# Altium PCB ADE7753.PcbDoc
Units mm, origin at the board's own origin, x right, y up, seen from the top; angles counter-clockwise.
Board outline 99.95 x 99.95 mm, 2 copper layers (Top Layer, Bottom Layer); 35 components, 35 nets, 163 pads, 0 vias.
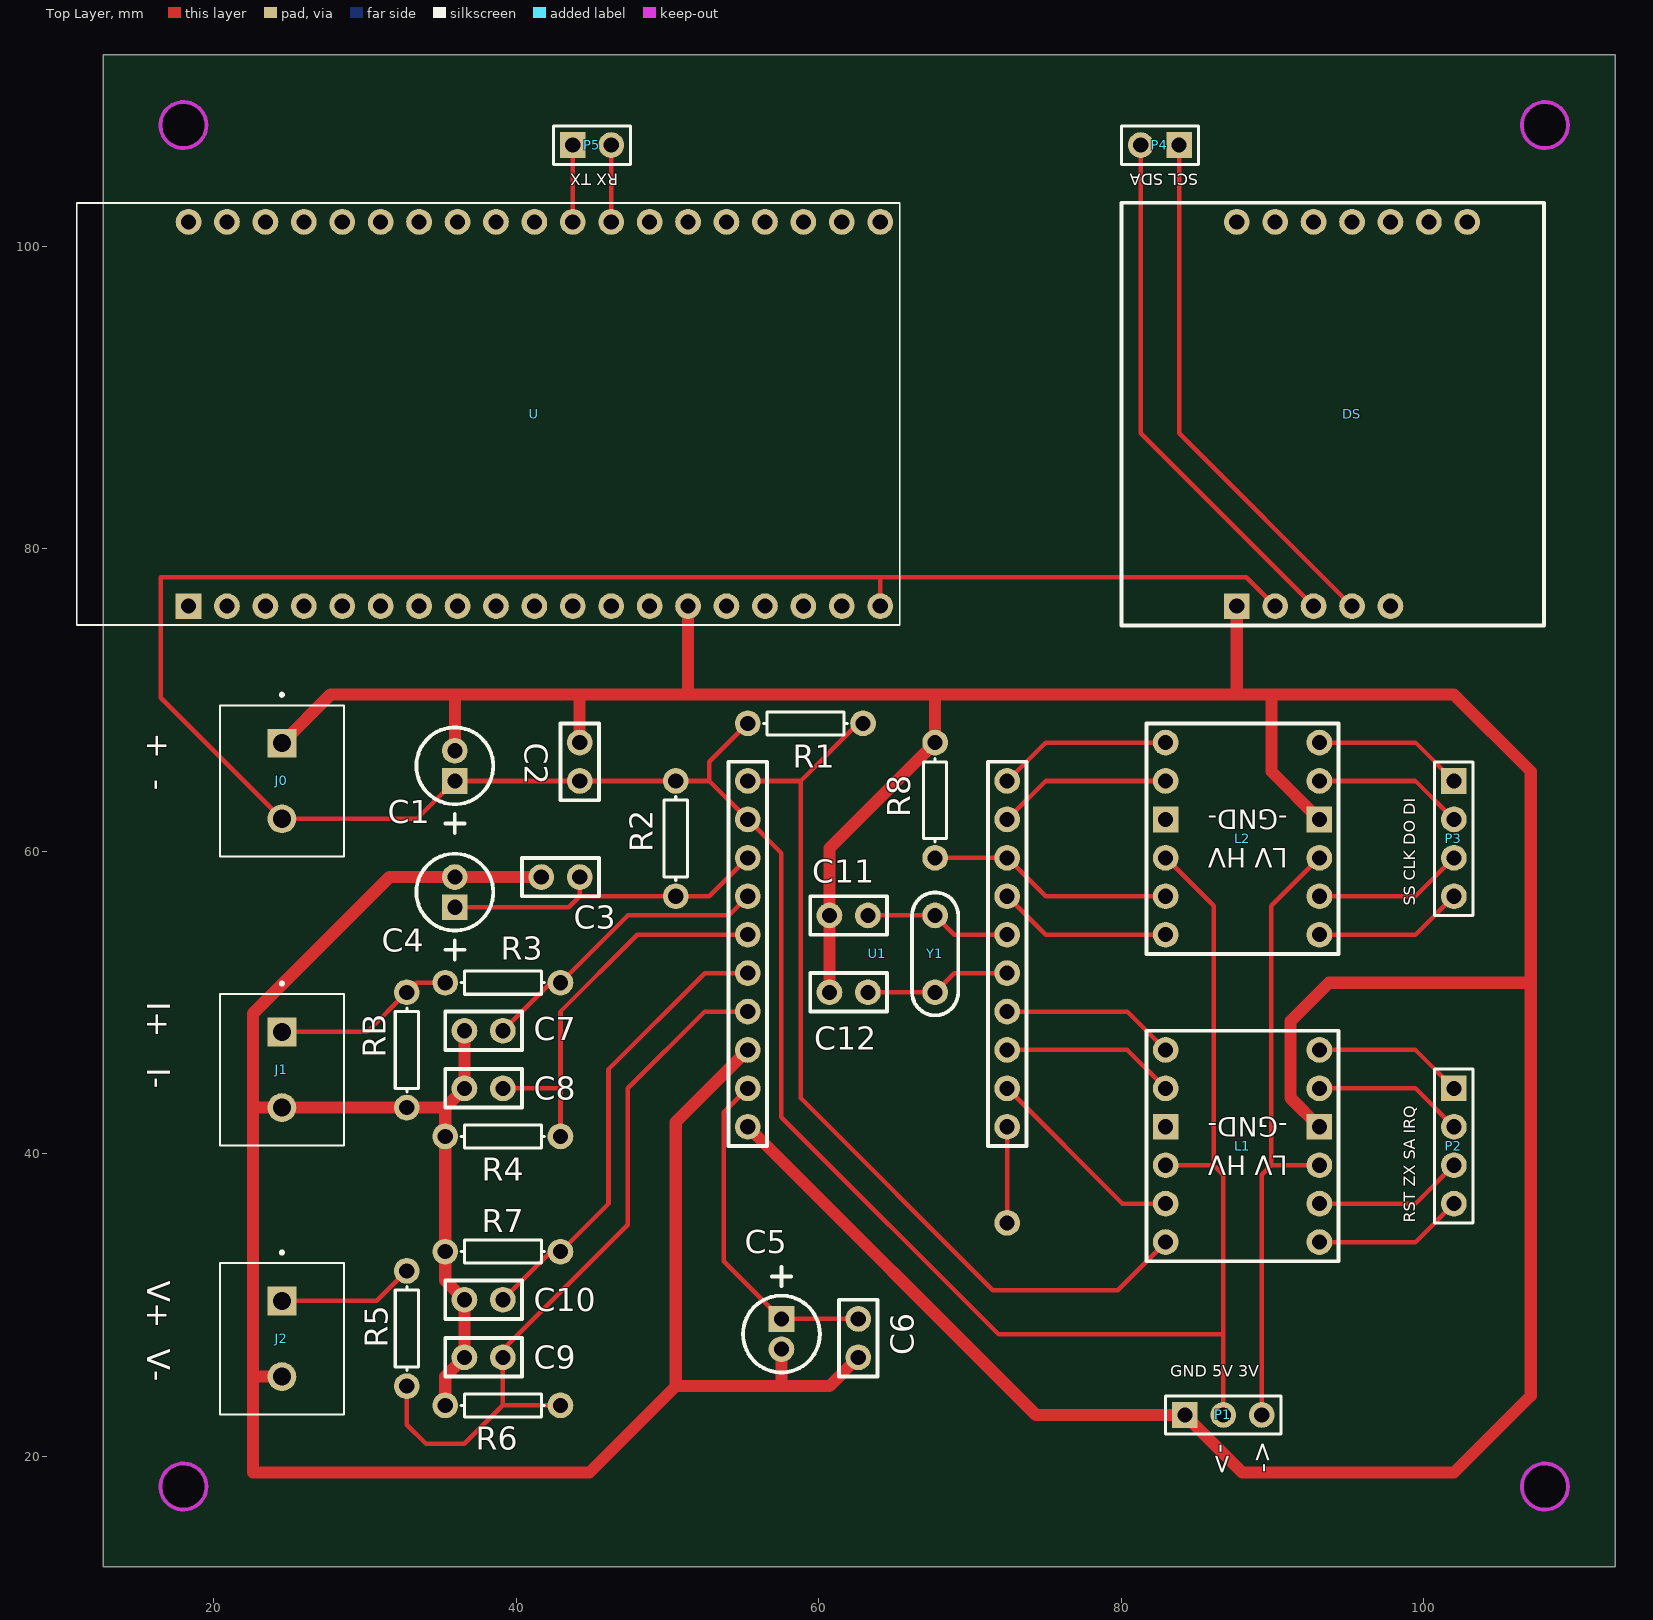
[diagram p0: Top Layer view]
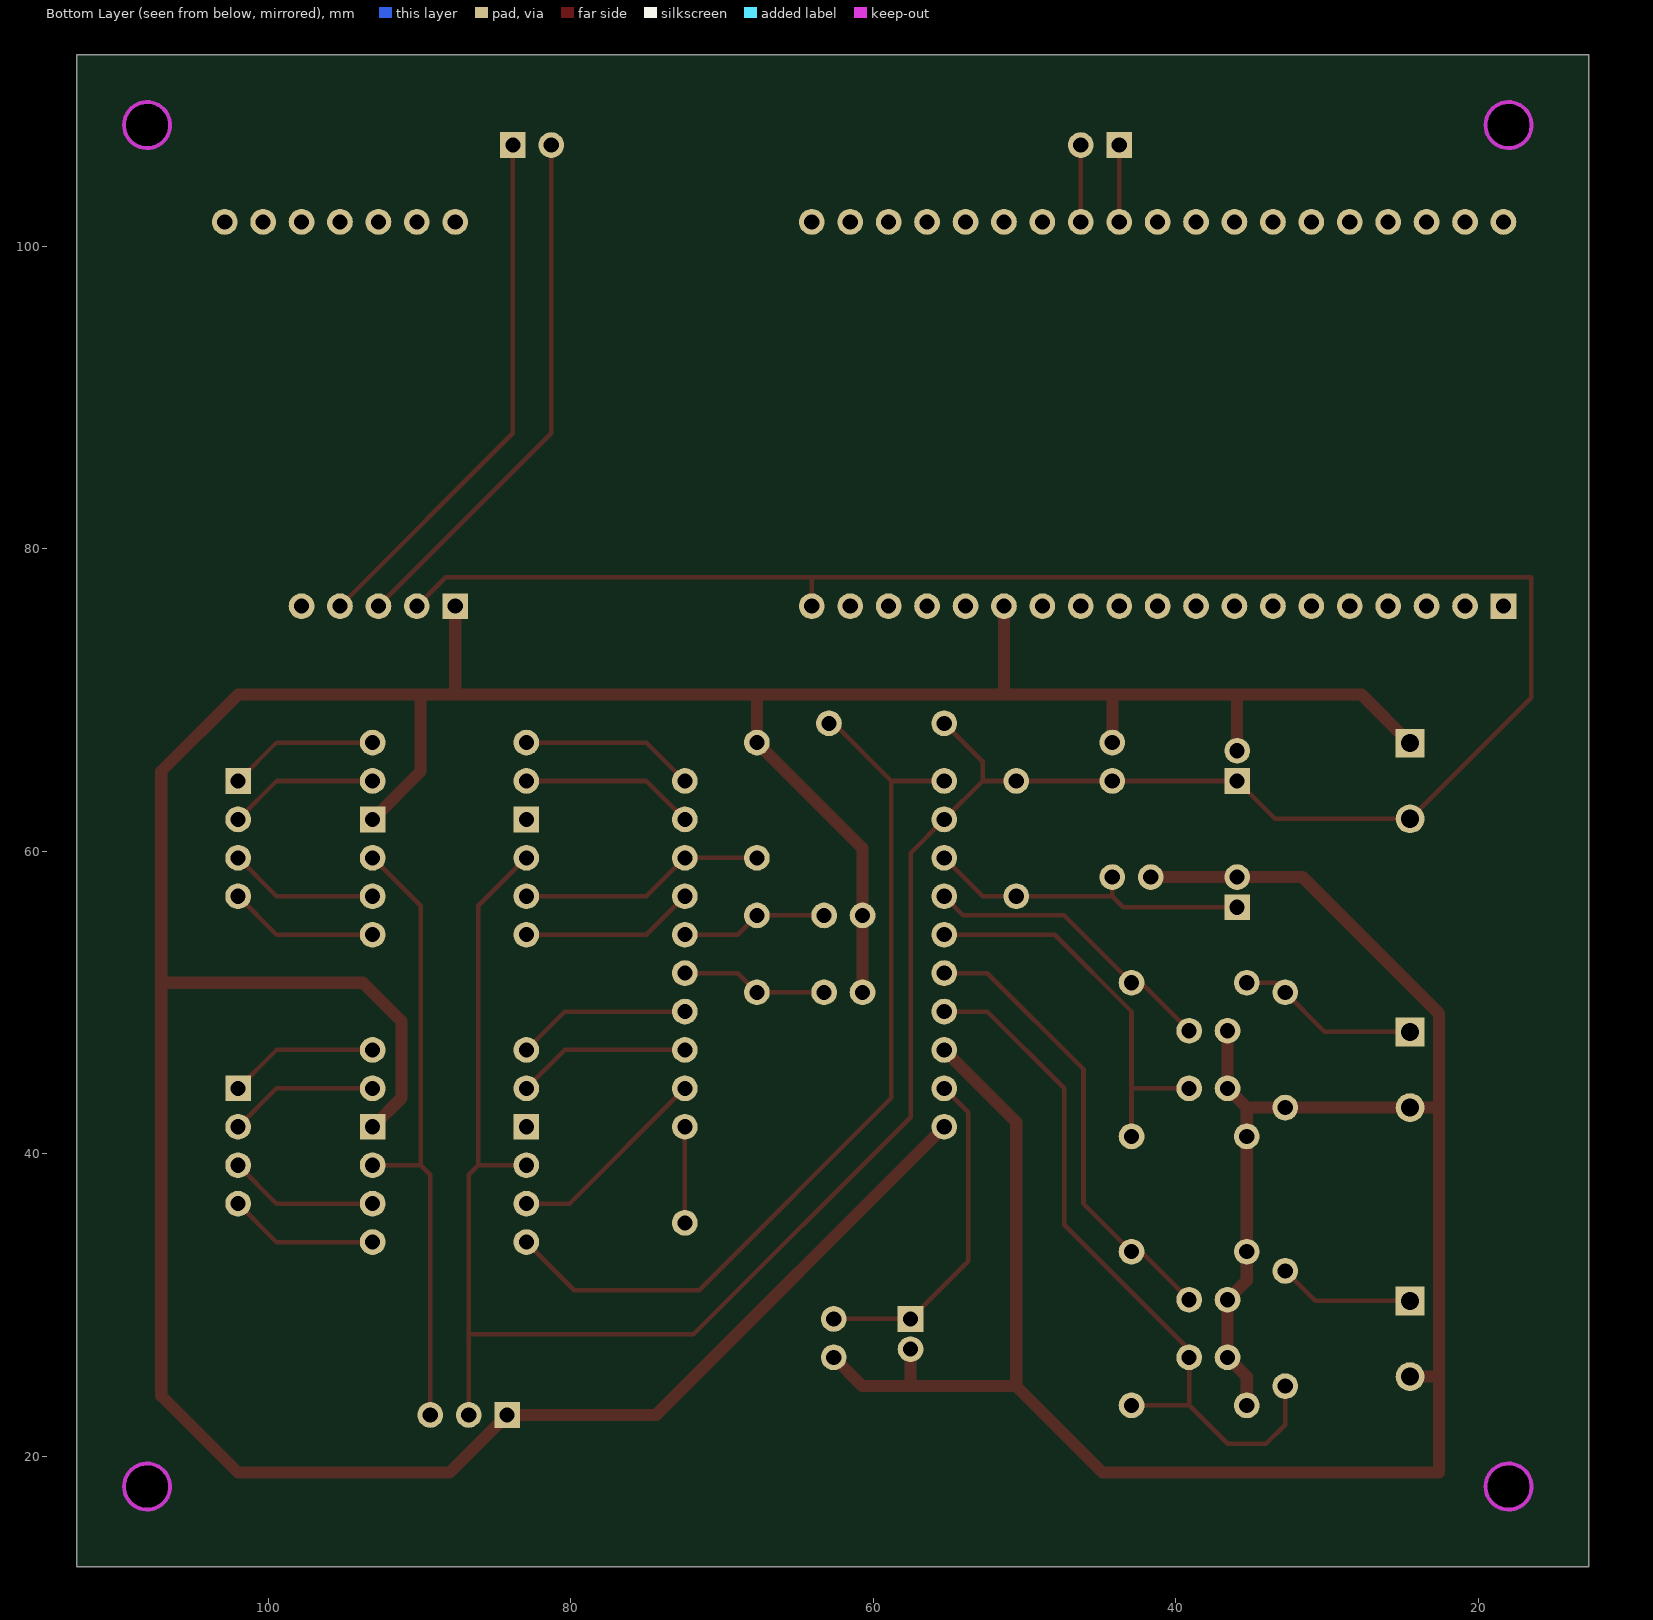
[diagram p1: Bottom Layer view, seen from below]

## Layer stack, top to bottom
Top Solder: solder mask 0.0102, Solder Resist, Dk 3.5
Top Layer: signal copper 0.0356
Dielectric 1: dielectric 0.32, FR-4, Dk 4.8
Bottom Layer: signal copper 0.0356
Bottom Solder: solder mask 0.0102, Solder Resist, Dk 3.5

## Board outline
12.7,12.7 112.649,12.7 112.649,112.649 12.7,112.649
cut-out: 106.475,18 ccw(c108,18) 108,16.475 ccw(c108,18) 109.525,18 ccw(c108,18) 108,19.525 ccw(c108,18)
cut-out: 18,16.475 cw(c18,18) 16.475,18 cw(c18,18) 18,19.525 cw(c18,18) 19.525,18 cw(c18,18)
cut-out: 108,106.475 cw(c108,108) 106.475,108 cw(c108,108) 108,109.525 cw(c108,108) 109.525,108 cw(c108,108)
cut-out: 18,106.475 cw(c18,108) 16.475,108 cw(c18,108) 18,109.525 cw(c18,108) 19.525,108 cw(c18,108)

## Design rules (kind name [scope] priority, off if disabled: settings)
Clearance [All] p1: gap=0.254 ignorepadtopadclearanceinfootprint=FALSE
ComponentClearance [All] p1: gap=0 collisioncheckmode=3 verticalgap=0 showdistances=FALSE
HoleSize [All] p1: absolutevalues=TRUE maxlimit=2.54 minlimit=1 maxpercent=80.000 minpercent=20.000
PolygonConnect [All] p1: connectstyle=Relief reliefconductorwidth=0.254 reliefentries=4 polygonreliefangle="90 Angle" airgapwidth=0.254
RoutingVias [All] p1: holewidth=0.711 width=1.27 viastyle="Through Hole" minholewidth=0.711 minwidth=1.27 maxholewidth=0.711 maxwidth=1.27
SolderMaskExpansion [All] p1: expansion=0.102
Width [All] p1: maxlimit=1 minlimit=0.3 preferedwidth=0.3
28 further rules are at their usual default settings.

## Components (designator, comment, footprint, x,y, rotation, side; value= is the part's Value field where it differs from the comment)
C1 "Cap Pol1" "Tu hóa 10uF 50v" 35.941,65.643 r90 top value=10uF
C2 "Cap" "Tu Gom" 44.196,65.913 r90 top value=100nF
C3 "Cap" "Tu Gom" 42.926,58.293 r180 top value=100nF
C4 "Cap Pol1" "Tu hóa 10uF 50v" 35.941,57.293 r90 top value=220uF
C5 "Cap Pol1" "Tu hóa 10uF 50v" 57.531,28.083 r270 top value=10uF
C6 "Cap" "Tu Gom" 62.611,27.813 r90 top value=100nF
C7 "Cap" "Tu Gom" 37.846,48.133 r0 top value=33nF
C8 "Cap" "Tu Gom" 37.846,44.323 r180 top value=33nF
C9 "Cap" "Tu Gom" 37.846,26.543 r0 top value=33nF
C10 "Cap" "Tu Gom" 37.846,30.353 r180 top value=33nF
C11 "Cap" "Tu Gom" 61.976,55.753 r0 top value=22pF
C12 "Cap" "Tu Gom" 61.976,50.673 r0 top value=22pF
DS "DS1307" PCBComponent_1 95.25,88.9 r90 top
J0 "Power" CONN_282836-2 24.511,64.643 r270 top
J1 "V1" CONN_282836-2 24.511,45.553 r270 top
J2 "V2" CONN_282836-2 24.511,27.773 r270 top
L1 "Logic" "Logic level 3-5" 88.011,40.513 r180 top
L2 "Logic" "Logic level 3-5" 88.011,60.833 r180 top
P1 "Header 3" HDR1X3 84.201,22.733 r0 top
P2 "Header 4" HDR1X4 101.981,44.323 r270 top
P3 "Header 4" HDR1X4 101.981,64.643 r270 top
P4 "Header 2" HDR1X2 83.82,106.68 r180 top
P5 "Header 2" HDR1X2 43.74,106.68 r0 top
R1 "Res1" AXIAL-0.3 59.118,68.453 r180 top value=10K
R2 "Res1" AXIAL-0.3 50.546,60.833 r90 top value=10R
R3 "Res1" AXIAL-0.3 39.116,51.308 r0 top value=1K
R4 "Res1" AXIAL-0.3 39.116,41.148 r0 top value=1K
R5 "Res1" AXIAL-0.3 32.766,28.448 r270 top value=1M
R6 "Res1" AXIAL-0.3 39.116,23.368 r0 top value=1K
R7 "Res1" AXIAL-0.3 39.116,33.528 r180 top value=1K
R8 "Res1" AXIAL-0.3 67.691,63.373 r270 top value=10K
RB "Res1" AXIAL-0.3 32.766,46.863 r90 top value=1K
U "ESP32-DEVKITC-32D" MODULE_ESP32-DEVKITC-32D 38.1,88.9 r90 top
U1 "ADE7753" ADE_Header 63.881,53.213 r0 top
Y1 "XTAL" "3.5795 mhz crystal" 67.691,53.213 r270 top

## Footprints (in the part's own frame and the unit in brackets; to place one, negate y for a bottom-side part, rotate by r counter-clockwise, add the part's x,y. Pads: shape width x height; smd on the part's side, far side on the other; paste and mask are expansions set on the pad)
"3.5795 mhz crystal" [mm]
  round 1.7 hole 1: 1(-2.54,0) 1(-2.54,0) 2(2.54,0)
  silkscreen extent -4.06,-1.52 4.06,1.52
ADE_Header [mm]
  round 1.7 hole 1 mask+0.1: 1(-8.572,11.43) 2(-8.572,8.89) 3(-8.572,6.35) 4(-8.572,3.81) 5(-8.572,1.27) 6(-8.572,-1.27) 7(-8.572,-3.81) 8(-8.572,-6.35) 9(-8.572,-8.89) 10(-8.572,-11.43) 11(8.572,-11.43) 12(8.572,-8.89) 13(8.572,-6.35) 14(8.572,-3.81) 15(8.572,-1.27) 16(8.572,1.27) 17(8.572,3.81) 18(8.572,6.35) 19(8.572,8.89) 20(8.572,11.43)
  silkscreen extent -9.84,-12.7 9.84,12.7
AXIAL-0.3 [mm] "Axial Device, Thru-Hole; 2 Leads; 0.3 in Pin Spacing"
  round 1.7 hole 1: 1(-3.81,0) 2(3.81,0)
  silkscreen extent -2.77,-0.76 2.77,0.76
CONN_282836-2 [mm]
  rect 1.9x1.9 hole 1.2: 1(-2.5,0)
  round 1.9 hole 1.2: 2(2.5,0)
  silkscreen extent -5.8,-4.1 5,4.1, body extent -5.28,-4.1 5.32,4.1, height 10.08
HDR1X2 [mm] "Connector; Header; 2 Position"
  rect 1.7x1.7 hole 1: 1(0,0)
  round 1.7 hole 1: 2(2.54,0)
  silkscreen extent -1.27,-1.27 3.81,1.27
HDR1X3 [mm] "Connector; Header; 3 Position"
  rect 1.7x1.7 hole 1: 1(0,0)
  round 1.7 hole 1: 2(2.54,0) 3(5.08,0)
  silkscreen extent -1.27,-1.27 6.35,1.27
HDR1X4 [mm] "Connector; Header; 4 Position"
  rect 1.7x1.7 hole 1: 1(0,0)
  round 1.7 hole 1: 2(2.54,0) 3(5.08,0) 4(7.62,0)
  silkscreen extent -1.27,-1.27 8.89,1.27
"Logic level 3-5" [mm] "4 channels , 12 pins"
  round 1.7 hole 1 mask+0.1: 1(-5.08,6.35) 1(-5.08,6.35) 2(5.08,6.35) 3(-5.08,3.81) 4(5.08,3.81) 5(-5.08,1.27) 6(5.08,1.27) 9(-5.08,-3.81) 10(5.08,-3.81) 11(-5.08,-6.35) 12(5.08,-6.35)
  rect 1.7x1.7 hole 1 mask+0.1: 7(-5.08,-1.27) 8(5.08,-1.27)
  silkscreen extent -6.35,-7.62 6.35,7.62
MODULE_ESP32-DEVKITC-32D [mm]
  rect 1.7x1.7 hole 1: 1(-12.7,19.76)
  round 1.7 hole 1: 2(-12.7,17.22) 3(-12.7,14.68) 4(-12.7,12.14) 5(-12.7,9.6) 6(-12.7,7.06) 7(-12.7,4.52) 8(-12.7,1.98) 9(-12.7,-0.56) 10(-12.7,-3.1) 11(-12.7,-5.64) 12(-12.7,-8.18) 13(-12.7,-10.72) 14(-12.7,-13.26) 15(-12.7,-15.8) 16(-12.7,-18.34) 17(-12.7,-20.88) 18(-12.7,-23.42) 19(-12.7,-25.96) 20(12.7,19.76) 21(12.7,17.22) 22(12.7,14.68) 23(12.7,12.14) 24(12.7,9.6) 25(12.7,7.06) 26(12.7,4.52) 27(12.7,1.98) 28(12.7,-0.56) 29(12.7,-3.1) 30(12.7,-5.64) 31(12.7,-8.18) 32(12.7,-10.72) 33(12.7,-13.26) 34(12.7,-15.8) 35(12.7,-18.34) 36(12.7,-20.88) 37(12.7,-23.42) 38(12.7,-25.96)
  silkscreen extent -13.95,-27.25 13.95,27.15
PCBComponent_1 [mm]
  rect 1.7x1.7 hole 1 mask+0.1: 1(-12.7,7.62)
  round 1.7 hole 1 mask+0.1: 2(-12.7,5.08) 3(-12.7,2.54) 4(-12.7,0) 5(-12.7,-2.54) 6(12.7,-7.62) 7(12.7,-5.08) 8(12.7,-2.54) 9(12.7,0) 10(12.7,2.54) 11(12.7,5.08) 12(12.7,7.62)
  silkscreen extent -13.97,-12.7 13.97,15.24
"Tu Gom" [mm]
  round 1.7 hole 1: 1(-1.27,0) 2(1.27,0)
  silkscreen extent -2.54,-1.27 2.54,1.27
"Tu hóa 10uF 50v" [mm] "5x11mm, lead space 2mm"
  rect 1.7x1.7 hole 1: 1(-1,0)
  round 1.7 hole 1: 2(1,0)
  silkscreen extent -4.44,-2.54 2.54,2.54

## Part data
C1 C4 C5: "Polarized Capacitor (Radial)", LatestRevisionDate=17-Jul-2002, LatestRevisionNote="Re-released for DXP Platform.", PackageDescription="Polarized Capacitor (Radial); 2 Leads", PackageReference=RB7.6-15, Published=8-Jun-2000, Publisher="Altium Limited"
C2 C3 C6 C7 C8 C9 C10 C11 C12: "Capacitor", LatestRevisionDate=17-Jul-2002, LatestRevisionNote="Re-released for DXP Platform.", PackageDescription="Radial Cap, Thru-Hole; 2 Leads; 0.3 in Pin Spacing", PackageReference=RAD-0.3, Published=8-Jun-2000, Publisher="Altium Limited"
DS: library part Component_1
J0 J1 J2: library part 282836-2, "TERM BLOCK 2POS SIDE ENTRY 5MM", Package=None, Availability=Unavailable, MF="{'manufacturer': u'TE Connectivity'}", MP=282836-2, Price=None
L1 L2: library part "Header 6X2", "Header, 6-Pin, Dual row", LatestRevisionDate=17-Jul-2002, LatestRevisionNote="Re-released for DXP Platform.", Publisher="Altium Limited"
P1: "Header, 3-Pin", LatestRevisionDate=17-Jul-2002, LatestRevisionNote="Re-released for DXP Platform.", Publisher="Altium Limited"
P2 P3: "Header, 4-Pin", LatestRevisionDate=17-Jul-2002, LatestRevisionNote="Re-released for DXP Platform.", Publisher="Altium Limited"
P4 P5: "Header, 2-Pin", LatestRevisionDate=17-Jul-2002, LatestRevisionNote="Re-released for DXP Platform.", Publisher="Altium Limited"
R1 R2 R3 R4 R5 R6 R7 R8 RB: "Resistor", LatestRevisionDate=17-Jul-2002, LatestRevisionNote="Re-released for DXP Platform.", PackageDescription="Axial Device, Thru-Hole; 2 Leads; 0.3 in Pin Spacing", PackageReference=AXIAL-0.3, Published=8-Jun-2000, Publisher="Altium Limited"
U: "- Transceiver; 802.11 b/g/n _Wi-Fi, WiFi, WLAN_, Bluetooth® Smart Ready 4.x Dual Mode For Use With ESP-WROOM-32", Package=None, Availability=Unavailable, MF="Espressif Systems", MP=ESP32-DEVKITC-32D, Price=None, SnapEDA_Link=https://www.snapeda.com/parts/ESP32-DEVKITC-32D/Espressif%20Systems/view-part/2777395/?ref=snap
U1: "Single-Phase Multifunction Metering IC", Package=None, Availability=Unavailable, MF="{'manufacturer': u'Analog Devices'}", MP=ADE7753, Price=None
Y1: "Crystal Oscillator", LatestRevisionDate=17-Jul-2002, LatestRevisionNote="Re-released for DXP Platform.", PackageDescription="Crystal, Thru-Hole; 2 Leads; Body 3.1 x 8.2 mm (Dia.xH)", PackageReference=R38, Published=8-Jun-2000, Publisher="Altium Limited"

## Free pads (board coordinates)
  round 1.7 hole 1: 0(72.453,35.433)

## Nets (pads, with @x,y where several pads share a name; then routed paths per layer and width w, separated by ;. In a path a pad name is that pad's centre, name@x,y a point inside that pad or via, vN(x,y) a via of type N, cw(c..) or ccw(c..) an arc to the next point about the centre after c; other vN are vias at no path point)
+3: L1.5 L2.5 P1.3 | length 41.6
  Top Layer w0.3: P1.3 89.281,38.608 89.916,39.243 ; L1.5 89.916,39.243 ; L2.5 89.916,56.388 89.916,39.243
+5: C1.1 C2.1 DS.2 J0.2 L1.6 L2.6 P1.2 R1.2 R2.2 U1.2 U.19 | length 230.7
  Top Layer w0.3: R1.2 52.769,65.913 52.769,64.643 ; 64.008,78.105 16.51,78.105 16.51,70.144 J0.2 33.441,62.143 C1.1 C2.1 R2.2 52.769,64.643 ; U.19 64.06,78.105 88.265,78.105 DS.2 ; L1.6 86.106,39.243 ; L2.6 86.106,56.388 86.106,39.243 ; P1.2 86.741,28.067 ; 52.769,64.643 U1.2 57.531,59.881 57.531,42.418 71.882,28.067 86.741,28.067 ; 86.106,39.243 86.741,38.608 86.741,28.067
AGND: C3.2 C4.2 C5.2 C6.1 C7.1 C8.2 C9.1 C10.2 J1.2 J2.2 R4.1 R6.1 R7.2 RB.1 U1.8 | length 163.9
  Top Layer w0.8: J2.2 22.606,25.273 ; R6.1 35.306,25.273 C9.1 C10.2 35.306,31.623 R7.2 R4.1 35.306,43.053 ; C7.1 C8.2 35.306,43.053 ; C3.2 C4.2 31.623,58.293 22.606,49.276 22.606,43.053 ; U1.8 50.546,42.101 50.546,24.638 ; C5.2 57.531,24.638 ; C6.1 60.706,24.638 57.531,24.638 ; 22.606,25.273 22.606,43.053 ; 22.606,25.273 22.606,18.923 44.831,18.923 50.546,24.638 ; 22.606,43.053 J1.2 RB.1 35.306,43.053 ; 50.546,24.638 57.531,24.638
CF: pad.0 U1.11 | length 6.4
  Top Layer w0.3: pad.0 U1.11
CS: L2.2 U1.17 | length 11.5
  Top Layer w0.3: U1.17 74.994,54.483 L2.2
DIN: L2.12 U1.20 | length 11.5
  Top Layer w0.3: U1.20 74.993,67.183 L2.12
DOUT: L2.10 U1.19 | length 11.5
  Top Layer w0.3: U1.19 74.993,64.643 L2.10
GND: C1.2 C2.2 C11.1 C12.1 DS.1 J0.1 L1.7 L2.7 P1.1 R8.1 U1.10 U.14 | length 266
  Top Layer w0.8: J0.1 27.726,70.358 35.941,70.358 ; C1.2 35.941,70.358 ; C2.2 44.196,70.358 ; U.14 51.36,70.358 ; U1.10 74.359,22.733 P1.1 88.011,18.923 101.981,18.923 107.061,24.003 107.061,51.308 ; C12.1 C11.1 60.706,60.198 R8.1 67.691,70.358 ; DS.1 87.63,70.358 ; L1.7 91.186,43.688 91.186,48.768 93.726,51.308 107.061,51.308 ; L2.7 89.916,65.278 89.916,70.358 ; 35.941,70.358 44.196,70.358 ; 44.196,70.358 51.36,70.358 ; 51.36,70.358 67.691,70.358 ; 67.691,70.358 87.63,70.358 ; 87.63,70.358 89.916,70.358 ; 89.916,70.358 101.981,70.358 107.061,65.278 107.061,51.308
IRQ: L1.11 P2.1 | length 9.9
  Top Layer w0.3: L1.11 99.441,46.863 P2.1
IRQ_5: L1.12 U1.14 | length 11.5
  Top Layer w0.3: U1.14 80.391,49.403 L1.12
MISO: L2.9 P3.2 | length 9.9
  Top Layer w0.3: L2.9 99.441,64.643 P3.2
MOSI: L2.11 P3.1 | length 9.9
  Top Layer w0.3: L2.11 99.441,67.183 P3.1
NetC3_1: C3.1 C4.1 R2.1 U1.3 | length 22
  Top Layer w0.3: C4.1 43.466,56.293 44.196,57.023 ; C3.1 44.196,57.023 ; U1.3 52.768,57.023 R2.1 44.196,57.023
NetC5_1: C5.1 C6.2 U1.9 | length 22.6
  Top Layer w0.3: U1.9 53.721,42.736 53.721,32.893 C5.1 C6.2
NetC11_2: C11.2 U1.16 Y1.1 | length 9.7
  Top Layer w0.3: C11.2 67.691,55.753 68.961,54.483 U1.16
NetC12_2: C12.2 U1.15 Y1.2 | length 9.7
  Top Layer w0.3: C12.2 Y1.2 68.961,51.943 U1.15
NetDS_3: DS.3 P4.2 | length 35.2
  Top Layer w0.3: P4.2 81.28,87.63 DS.3
NetDS_4: DS.4 P4.1 | length 35.2
  Top Layer w0.3: P4.1 83.82,87.63 DS.4
NetJ1_1: J1.1 R3.1 RB.2 | length 12.1
  Top Layer w0.3: J1.1 30.146,48.053 RB.2 33.401,51.308 R3.1
NetJ2_1: J2.1 R5.1 | length 9.1
  Top Layer w0.3: J2.1 30.781,30.273 R5.1
NetP5_1: P5.1 U.30 | length 5.1
  Top Layer w0.3: U.30 P5.1
NetP5_2: P5.2 U.31 | length 5.1
  Top Layer w0.3: U.31 P5.2
RST: L1.1 P2.4 | length 9.9
  Top Layer w0.3: L1.1@93.091,34.163 99.441,34.163 P2.4
RST_5: L1.2 R1.1 U1.1 | length 60.9
  Top Layer w0.3: U1.1 58.801,64.643 ; R1.1 62.611,68.453 58.801,64.643 ; L1.2 79.756,30.988 71.501,30.988 58.801,43.688 58.801,64.643
SAG: L1.9 P2.2 | length 9.9
  Top Layer w0.3: L1.9 99.441,44.323 P2.2
SAG_5: L1.10 U1.13 | length 11.5
  Top Layer w0.3: U1.13 80.391,46.863 L1.10
SCLK: L2.4 R8.2 U1.18 | length 16.3
  Top Layer w0.3: R8.2 U1.18 74.994,57.023 L2.4
SLK: L2.3 P3.3 | length 9.9
  Top Layer w0.3: L2.3 99.441,57.023 P3.3
SS: L2.1 P3.4 | length 9.9
  Top Layer w0.3: L2.1@93.091,54.483 99.441,54.483 P3.4
V1N: C8.1 R4.2 U1.5 | length 26.6
  Top Layer w0.3: C8.1 42.926,44.323 ; R4.2 42.926,44.323 ; U1.5 48.006,54.483 42.926,49.403 42.926,44.323
V1P: C7.2 R3.2 U1.4 | length 19.9
  Top Layer w0.3: C7.2 42.291,51.308 R3.2 47.371,55.753 54.038,55.753 U1.4
V2N: C10.1 R7.1 U1.6 | length 30.3
  Top Layer w0.3: C10.1 42.291,33.528 R7.1 46.101,36.703 46.101,45.593 52.451,51.943 U1.6
V2P: C9.2 R5.2 R6.2 U1.7 | length 48.7
  Top Layer w0.3: R5.2 32.766,22.098 34.036,20.828 36.576,20.828 39.116,23.368 ; R6.2 39.116,23.368 ; U1.7 52.451,49.403 47.371,44.323 47.371,35.306 39.116,27.051 C9.2 39.116,23.368
ZX: L1.3 P2.3 | length 9.9
  Top Layer w0.3: L1.3 99.441,36.703 P2.3
ZX_5: L1.4 U1.12 | length 13.6
  Top Layer w0.3: U1.12 80.074,36.703 L1.4
pads on no net: DS.5 DS.6 DS.7 DS.8 DS.9 DS.10 DS.11 DS.12 L1.8 L2.8 U.1 U.2 U.3 U.4 U.5 U.6 U.7 U.8 U.9 U.10 U.11 U.12 U.13 U.15 U.16 U.17 U.18 U.20 U.21 U.22 U.23 U.24 U.25 U.26 U.27 U.28 U.29 U.32 U.33 U.34 U.35 U.36 U.37 U.38

## Keep-outs
Keep-Out Layer:
  circle w0.254: c108,108 r1.525
  circle w0.254: c108,18 r1.525
  circle w0.254: c18,108 r1.525
  circle w0.254: c18,18 r1.525

## Silkscreen, mask and mechanical layers (free items; w line width, h text height)
Top Overlay:
  text "RX TX" at 46.736,104.775 h0.76 r180
  text "SCL SDA" at 85.09,104.775 h0.76 r180
  text "+  -" at 15.621,67.818 h1.52 r270
  text "SS CLK DO DI" at 99.441,56.388 h0.76 r90
  text "I+   I-" at 15.621,50.038 h1.52 r270
  text "RST ZX SA IRQ" at 99.441,35.433 h0.76 r90
  text "V+  V-" at 15.621,31.623 h1.52 r270
  text "GND 5V 3V" at 83.248,25.273 h0.76
  text "->" at 86.106,20.828 h1.27 r270
  text "->" at 89.916,18.923 h1.27 r90

## Text inside footprints (layer, text, board x,y; h text height)
L1: Top Overlay "-GND-" at 90.995,42.418 h1.27 r180; Top Overlay "LV HV" at 90.995,39.878 h1.27 r180
L2: Top Overlay "-GND-" at 90.995,62.738 h1.27 r180; Top Overlay "LV HV" at 90.995,60.198 h1.27 r180